# Altium PCB BellSystem.PcbDoc
Units mil, origin at the board's own origin, x right, y up, seen from the top; angles counter-clockwise.
Board outline 2665 x 2750 mil, 2 copper layers (Top Layer, Bottom Layer); 27 components, 39 nets, 118 pads, 0 vias.
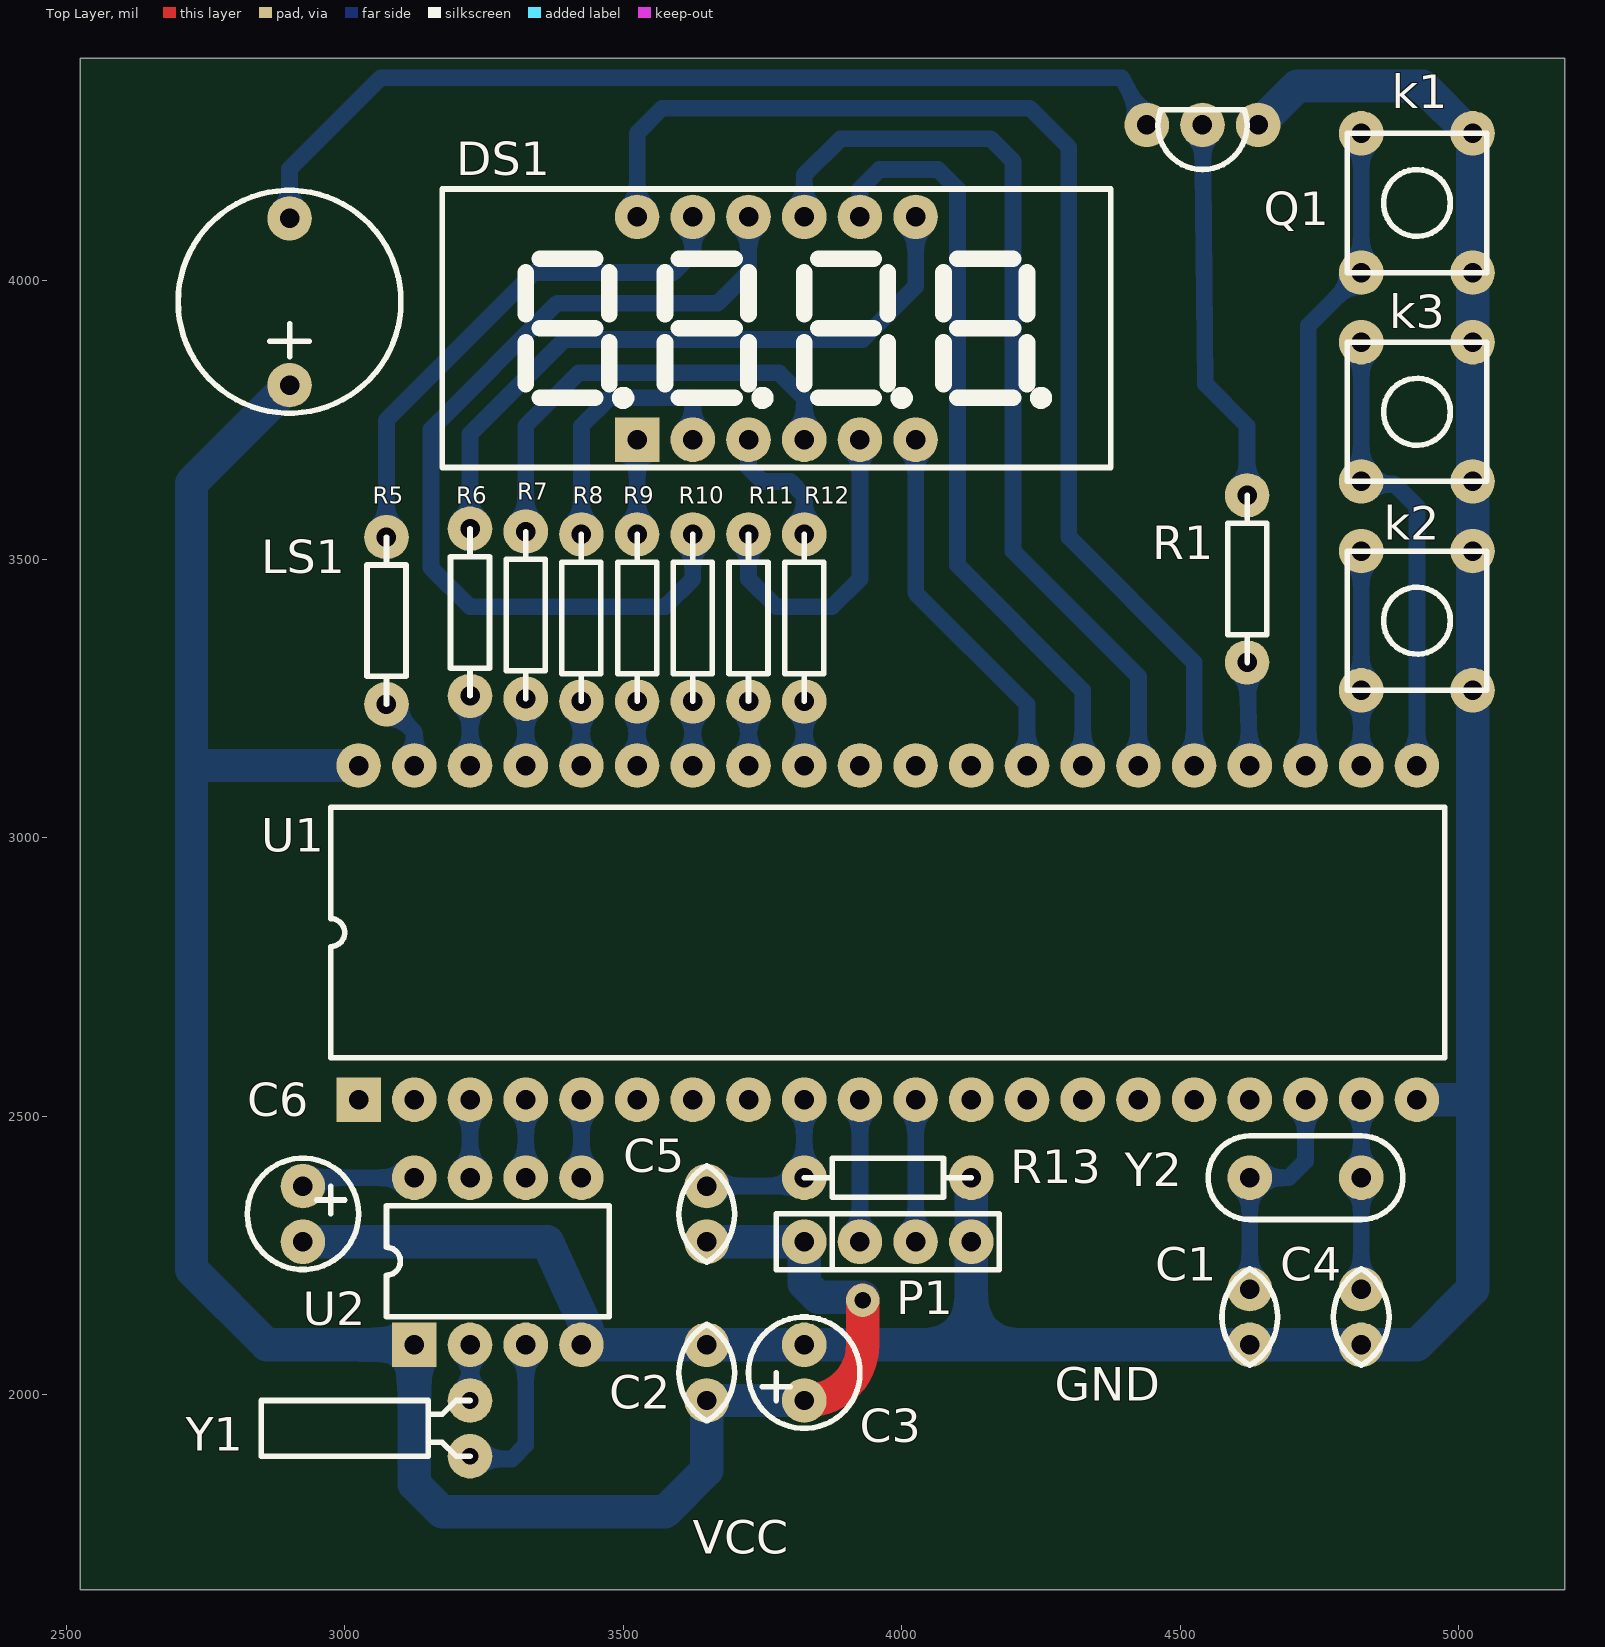
[diagram p0: Top Layer view]
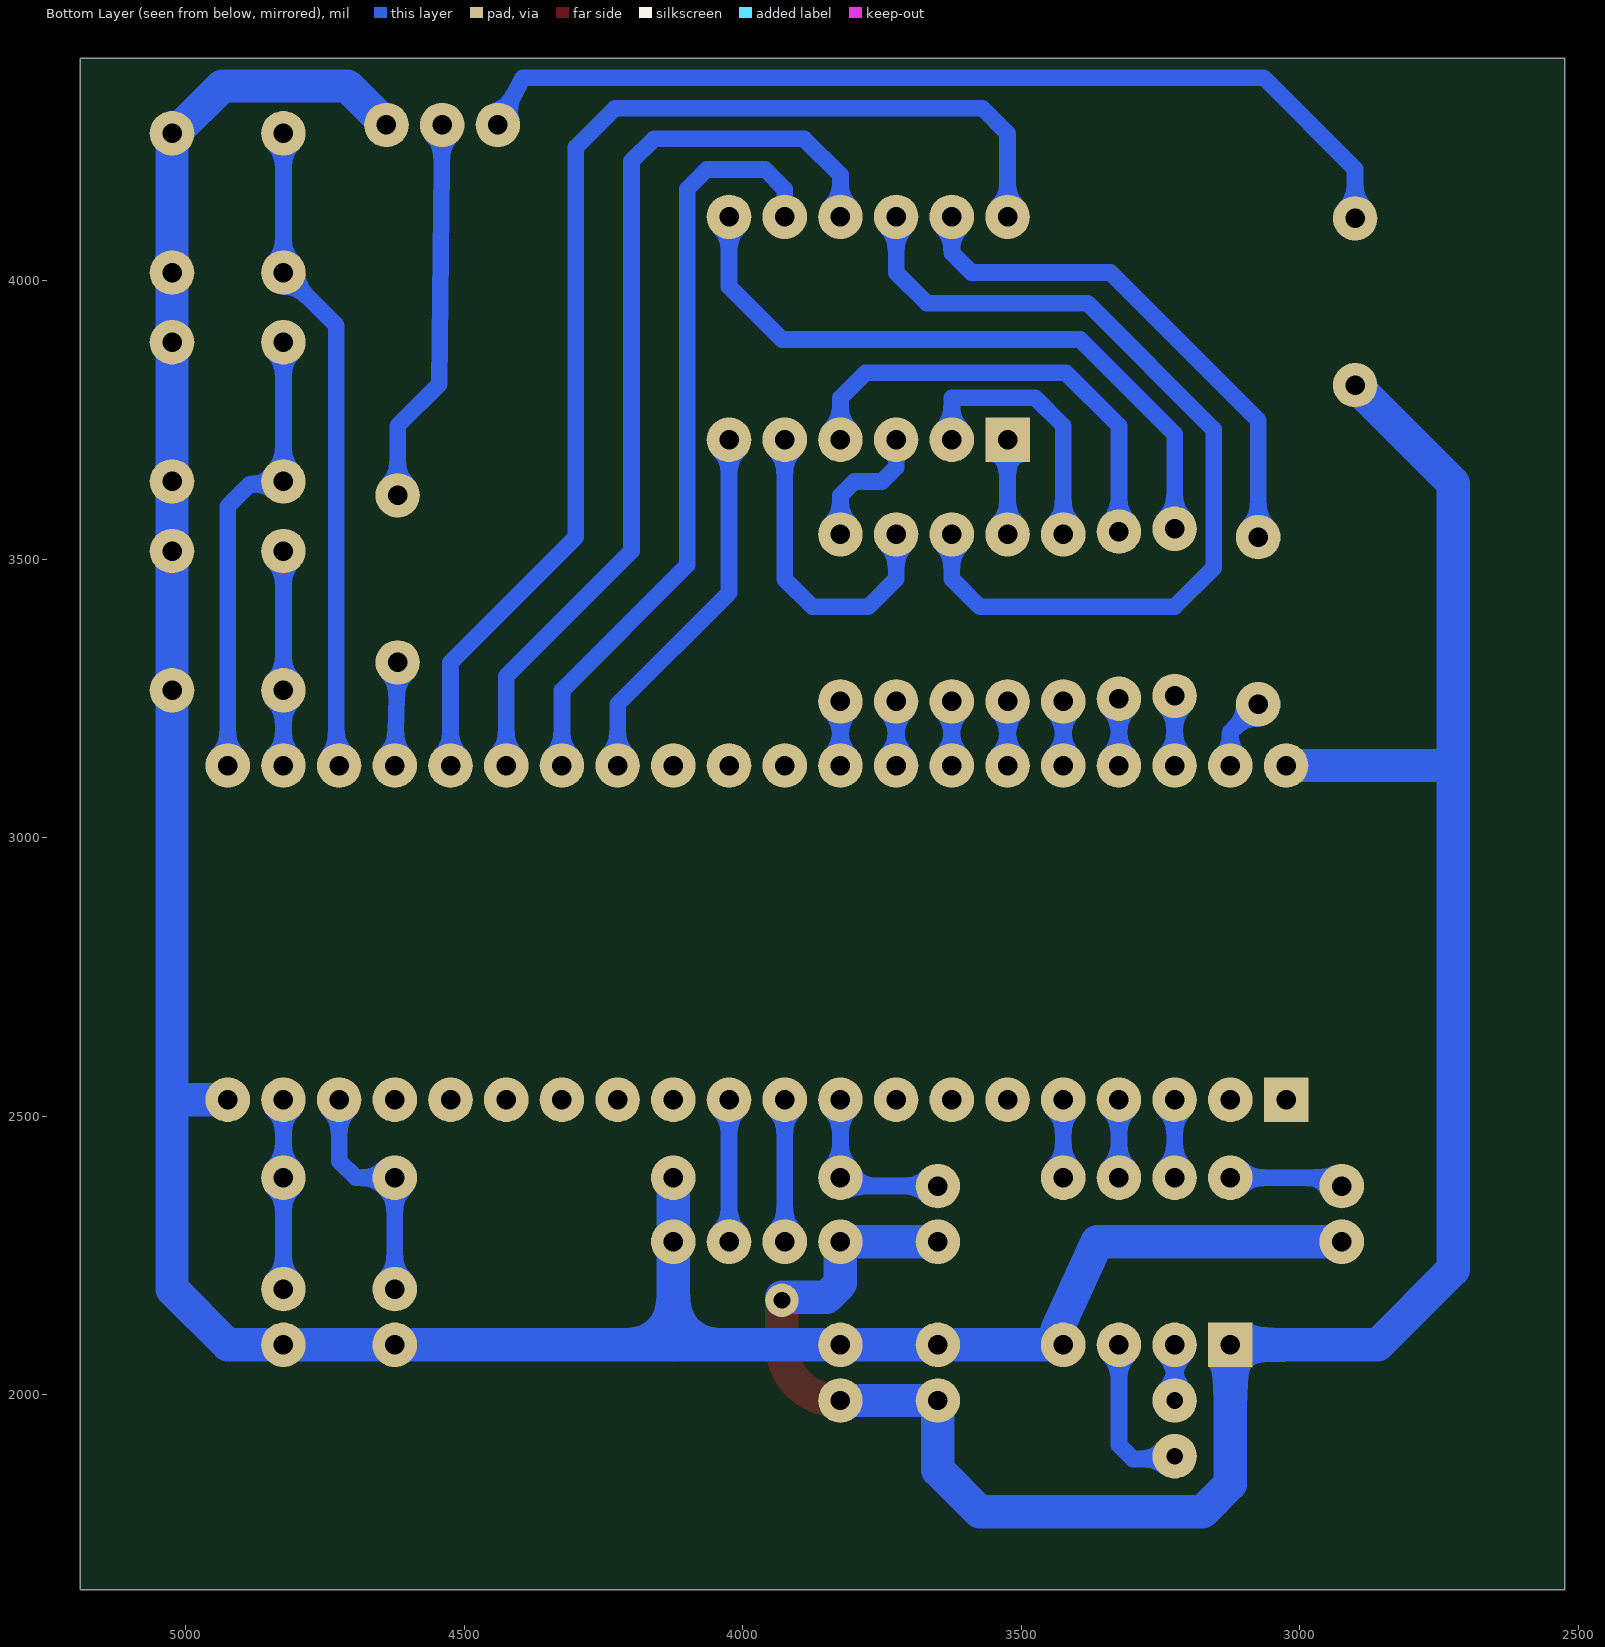
[diagram p1: Bottom Layer view, seen from below]

## Layer stack, top to bottom
Top Solder: solder mask 0.4, Solder Resist, Dk 3.5
Top Layer: signal copper 1.4
Dielectric 1: dielectric 12.6, FR-4, Dk 4.8
Bottom Layer: signal copper 1.4
Bottom Solder: solder mask 0.4, Solder Resist, Dk 3.5

## Board outline
2525,1650 5190,1650 5190,4400 2525,4400

## Design rules (kind name [scope] priority, off if disabled: settings)
Clearance [All] p1: gap=15
PolygonConnect [All] p1: connectstyle=Relief reliefconductorwidth=10 reliefentries=4 polygonreliefangle="90 Angle" airgapwidth=10
RoutingVias [All] p1: holewidth=28 width=50 viastyle="Through Hole" minholewidth=28 minwidth=50 maxholewidth=28 maxwidth=50
SolderMaskExpansion [All] p1: expansion=4
Width [All] p1: maxlimit=60 minlimit=10 preferedwidth=30
30 further rules are at their usual default settings.

## Components (designator, comment, footprint, x,y, rotation, side; value= is the part's Value field where it differs from the comment)
C1 "22" CAP 4625,2090 r90 top
C2 "104" CAP 3650,2090 r270 top
C3 "10u" RB.1/.2 3825,1990 r90 top
C4 "22" CAP 4825,2090 r90 top
C5 "223" cap 3650,2275 r90 top
C6 "100u" RB.1/.2 2925,2375 r270 top
DS1 "LED-4" 7SEG_036X4 3525,3715 r0 top
k1 "+" SW-4 4825,4015 r0 top
k2 "SET" SW-4 4825,3265 r0 top
k3 "-" SW-4 4825,3640 r0 top
LS1 "Bell" 蜂鸣器 2900,3815 r90 top
P1 "ISP" SIP4 3825,2275 r0 top
Q1 "9013" TO-92 4640,4280 r180 top
R1 "1k" AXIAL-0.3 4620,3615 r270 top
R5 "1.8k" AXIAL-0.3 3075,3240 r90 top
R6 "1.8" AXIAL-0.3 3225,3255 r90 top
R7 "1k" AXIAL-0.3 3325,3250 r90 top
R8 "1k" AXIAL-0.3 3425,3245 r90 top
R9 "1k" AXIAL-0.3 3525,3245 r90 top
R10 "1k" AXIAL-0.3 3625,3245 r90 top
R11 "1k" AXIAL-0.3 3725,3245 r90 top
R12 "1k" AXIAL-0.3 3825,3245 r90 top
R13 "10k" AXIAL-0.3 3825,2390 r0 top
U1 "STC12C5A60S2" STC89C52 3025,2530 r90 top
U2 "DS1302" DS1302 3125,2090 r90 top
Y1 "32768" 32768 3225,1890 r90 top
Y2 "22.1184M" XTAL 4825,2390 r180 top

## Footprints (in the part's own frame and the unit in brackets; to place one, negate y for a bottom-side part, rotate by r counter-clockwise, add the part's x,y. Pads: shape width x height; smd on the part's side, far side on the other; paste and mask are expansions set on the pad)
7SEG_036X4 [mil]
  rect 80x80 hole 35: 1(0,0)
  round 80 hole 35: 2(100,0) 3(200,0) 4(300,0) 5(400,0) 6(500,0) 7(500,400) 8(400,400) 9(300,400) 10(200,400) 11(100,400) 12(0,400)
  silkscreen extent -350,-50 850,450
32768 [mil]
  round 80 hole 30: 1(0,0) 2(100,0)
  silkscreen extent 0,0 100,375
AXIAL-0.3 [mil]
  round 80 hole 35: 1(0,0) 2(300,0)
  silkscreen extent 0,-35 300,35
CAP [mil]
  round 80 hole 35: 1(0,0) 2(100,0)
  silkscreen extent -37,-50 137,50
cap [mil]
  round 80 hole 35: 1(0,0) 2(100,0)
  silkscreen extent -37,-50 137,50
DS1302 [mil]
  rect 80x80 hole 35: 1(0,0)
  round 80 hole 35: 2(0,-100) 3(0,-200) 4(0,-300) 5(300,-300) 6(300,-200) 7(300,-100) 8(300,0)
  silkscreen extent 50,-350 250,50
RB.1/.2 [mil]
  round 80 hole 35: 1(0,0) 2(100,0)
  silkscreen extent -50,-100 150,100
SIP4 [mil]
  round 80 hole 35: 1(0,0) 2(100,0) 3(200,0) 4(300,0)
  silkscreen extent -50,-50 350,50
STC89C52 [mil]
  rect 80x80 hole 35: 1(0,0)
  round 80 hole 35: 2(0,-100) 3(0,-200) 4(0,-300) 5(0,-400) 6(0,-500) 7(0,-600) 8(0,-700) 9(0,-800) 10(0,-900) 11(0,-1000) 12(0,-1100) 13(0,-1200) 14(0,-1300) 15(0,-1400) 16(0,-1500) 17(0,-1600) 18(0,-1700) 19(0,-1800) 20(0,-1900) 21(600,-1900) 22(600,-1800) 23(600,-1700) 24(600,-1600) 25(600,-1500) 26(600,-1400) 27(600,-1300) 28(600,-1200) 29(600,-1100) 30(600,-1000) 31(600,-900) 32(600,-800) 33(600,-700) 34(600,-600) 35(600,-500) 36(600,-400) 37(600,-300) 38(600,-200) 39(600,-100) 40(600,0)
  silkscreen extent 75,-1950 525,50
SW-4 [mil]
  round 80 hole 35: 1(0,0) 1(0,250) 2(200,0) 2(200,250)
  silkscreen extent -25,0 225,250
TO-92 [mil]
  round 80 hole 35: 1(0,0) 2(100,0) 3(200,0)
  silkscreen extent 20,-27 180,80
XTAL [mil]
  round 80 hole 35: 1(0,0) 2(200,0)
  silkscreen extent -75,-75 275,75
蜂鸣器 [mil]
  round 80 hole 35: 1(-2,-1) 2(297.21,-1)
  silkscreen extent -52,-201 347,199, body extent -227,-237 381,235, height 380

## Part data
C1 C2 C4 C5: library part Cap, "Capacitor"
C3 C6: library part "Cap Pol1", "Polarized Capacitor (Radial)"
k1 k2 k3: library part SW-PB, "Switch"
LS1: "Electrical Bell"
P1: library part "Header 4", "Header, 4-Pin"
Q1: library part 2N3904, "NPN General Purpose Amplifier"
R1 R5 R6 R7 R8 R9 R10 R11 R12 R13: library part Res2, "Resistor"
Y1 Y2: library part XTAL, "Crystal Oscillator"

## Free pads (board coordinates)
  round 60 hole 30: 2(3930,2170)

## Nets (pads, with @x,y where several pads share a name; then routed paths per layer and width w, separated by ;. In a path a pad name is that pad's centre, name@x,y a point inside that pad or via, vN(x,y) a via of type N, cw(c..) or ccw(c..) an arc to the next point about the centre after c; other vN are vias at no path point)
GND: C1.1 C2.1 C3.2 C4.1 C6.2 k1.2 k2.2 k3.2 P1.4 Q1.1 R13.2 U1.20 U2.4 | length 5196.7
  Bottom Layer w60: C6.2 3363.57,2275 3435.39,2117.89 U2.4 C2.1 C3.2 4125,2090 ; R13.2 4125,2090 ; Q1.1 4710,4350 4935,4350 5020,4265 5025,4265 5025,4015 5025,3890 5025,3640 5025,3515 5025,3265 5025,2190 4925,2090 C4.1 C1.1 4125,2090 ; U1.20 5015,2530
NetC1_2: C1.2 U1.18 Y2.2 | length 422.4
  Bottom Layer w30: C1.2 Y2.2 4695,2390 4725,2420 U1.18
NetC4_2: C4.2 U1.19 Y2.1 | length 340
  Bottom Layer w30: C4.2 Y2.1 U1.19
NetC5_2: C5.2 R13.1 U1.9 | length 300
  Bottom Layer w30: C5.2 R13.1@3810,2375 ; R13.1 U1.9
NetC6_1: C6.1 U2.8 | length 185
  Bottom Layer w30: C6.1@2940,2390 U2.8
NetDS1_1: DS1.1 R9.2 | length 170
  Bottom Layer w30: R9.2 DS1.1
NetDS1_2: DS1.2 R8.2 | length 490.7
  Bottom Layer w30: R8.2 3425,3740 3475,3790 3625,3790 DS1.2
NetDS1_3: DS1.3 R12.2 | length 240.7
  Bottom Layer w30: DS1.3 3725,3665 3750,3640 3800,3640 3825,3615 R12.2
NetDS1_4: DS1.4 R7.2 | length 823
  Bottom Layer w30: R7.2 3325,3740 3420,3835 3780,3835 3825,3790 DS1.4
NetDS1_5: DS1.5 R11.2 | length 571.4
  Bottom Layer w30: R11.2 3725,3465 3775,3415 3875,3415 3925,3465 DS1.5
NetDS1_6: DS1.6 U1.28 | length 667.8
  Bottom Layer w30: DS1.6 4025,3440 4225,3240 U1.28
NetDS1_7: DS1.7 R6.2 | length 1204.8
  Bottom Layer w30: R6.2 3225,3725 3395,3895 3930,3895 4025,3990 DS1.7
NetDS1_8: DS1.8 U1.27 | length 1382.2
  Bottom Layer w30: DS1.8 3925,4165 3960,4200 4065,4200 4100,4165 4100,3490 4325,3265 U1.27
NetDS1_9: DS1.9 U1.26 | length 1671.7
  Bottom Layer w30: DS1.9 3825,4190 3890,4255 4160,4255 4200,4215 4200,3515 4425,3290 U1.26
NetDS1_10: DS1.10 R10.2 | length 1634.9
  Bottom Layer w30: R10.2 3625,3465 3575,3415 3225,3415 3155,3485 3155,3733.64 3381.36,3960 3670,3960 3725,4015 DS1.10
NetDS1_11: DS1.11 R5.2 | length 949.3
  Bottom Layer w30: R5.2 3075,3750 3340,4015 3590,4015 3625,4050 DS1.11
NetDS1_12: DS1.12 U1.25 | length 2175.8
  Bottom Layer w30: DS1.12 3525,4265 3570,4310 4230,4310 4300,4240 4300,3540 4525,3315 U1.25
Netk1_1: k1.1 U1.23 | length 1169.4
  Bottom Layer w30: U1.23@4730,3135 4730,3920 4825,4015 k1.1@4825,4265
Netk2_1: k2.1 U1.22 | length 385
  Bottom Layer w30: U1.22 4825,3265 k2.1@4825,3515
Netk3_1: k3.1 U1.21 | length 826.6
  Bottom Layer w30: k3.1@4825,3640 k3.1@4825,3890 ; k3.1@4830,3635 4885,3635 4925,3595 U1.21
NetLS1_2: LS1.2 Q1.3 | length 1746.9
  Bottom Layer w30: LS1.2 2901,4201 3065,4365 4395,4365 Q1.3
NetP1_2: P1.2 U1.10 | length 265
  Bottom Layer w30: P1.2@3925,2265 U1.10
NetP1_3: P1.3 U1.11 | length 265
  Bottom Layer w30: P1.3@4025,2265 U1.11
NetQ1_2: Q1.2 R1.1 | length 696.1
  Bottom Layer w30: Q1.2 4545,3815 4620,3740 R1.1
NetR1_2: R1.2 U1.24 | length 185.1
  Bottom Layer w30: R1.2 U1.24
NetR5_1: R5.1 U1.39 | length 130.7
  Bottom Layer w30: R5.1 3125,3190 U1.39
NetR6_1: R6.1 U1.38 | length 125
  Bottom Layer w30: U1.38 R6.1
NetR7_1: R7.1 U1.37 | length 120
  Bottom Layer w30: U1.37 R7.1
NetR8_1: R8.1 U1.36 | length 115
  Bottom Layer w30: U1.36 R8.1
NetR9_1: R9.1 U1.35 | length 115
  Bottom Layer w30: U1.35 R9.1
NetR10_1: R10.1 U1.34 | length 115
  Bottom Layer w30: U1.34 R10.1
NetR11_1: R11.1 U1.33 | length 115
  Bottom Layer w30: U1.33 R11.1
NetR12_1: R12.1 U1.32 | length 115
  Bottom Layer w30: U1.32 R12.1
NetU1_3: U1.3 U2.7 | length 140
  Bottom Layer w30: U2.7 U1.3
NetU1_4: U1.4 U2.6 | length 140
  Bottom Layer w30: U2.6 U1.4
NetU1_5: U1.5 U2.5 | length 140
  Bottom Layer w30: U2.5 U1.5
NetU2_2: U2.2 Y1.2 | length 100
  Bottom Layer w30: Y1.2 U2.2
NetU2_3: U2.3 Y1.1 | length 285.4
  Bottom Layer w30: Y1.1@3230,1885 3300,1885 3325,1910 U2.3
VCC: C2.2 C3.1 C5.1 LS1.1 P1.1 pad.2 U1.40 U2.1 | length 4146
  Top Layer w60: C3.1@3830,1990 ccw(c3830,2090) 3930,2090 pad.2
  Bottom Layer w60: 2730,3130 U1.40 ; LS1.1 2725,3637 2725,2225 2860,2090 U2.1 3125,1840 3175,1790 3575,1790 3650,1865 C2.2 C3.1 ; C5.1 P1.1 3825,2200 3850,2175 3930,2175 pad.2
pads on no net: U1.1 U1.2 U1.6 U1.7 U1.8 U1.12 U1.13 U1.14 U1.15 U1.16 U1.17 U1.29 U1.30 U1.31

## Keep-outs
Mechanical 1:
  the board outline again, w10

## Silkscreen, mask and mechanical layers (free items; w line width, h text height)
Top Overlay:
  text "GND" at 4275,1990 h60
  text "VCC" at 3625,1715 h60